# Altium PCB PCB4.PcbDoc
Units mm, origin at the board's own origin, x right, y up, seen from the top; angles counter-clockwise.
Board outline 56 x 20 mm, 2 copper layers (Top Layer, Bottom Layer); 31 components, 23 nets, 120 pads, 17 vias.
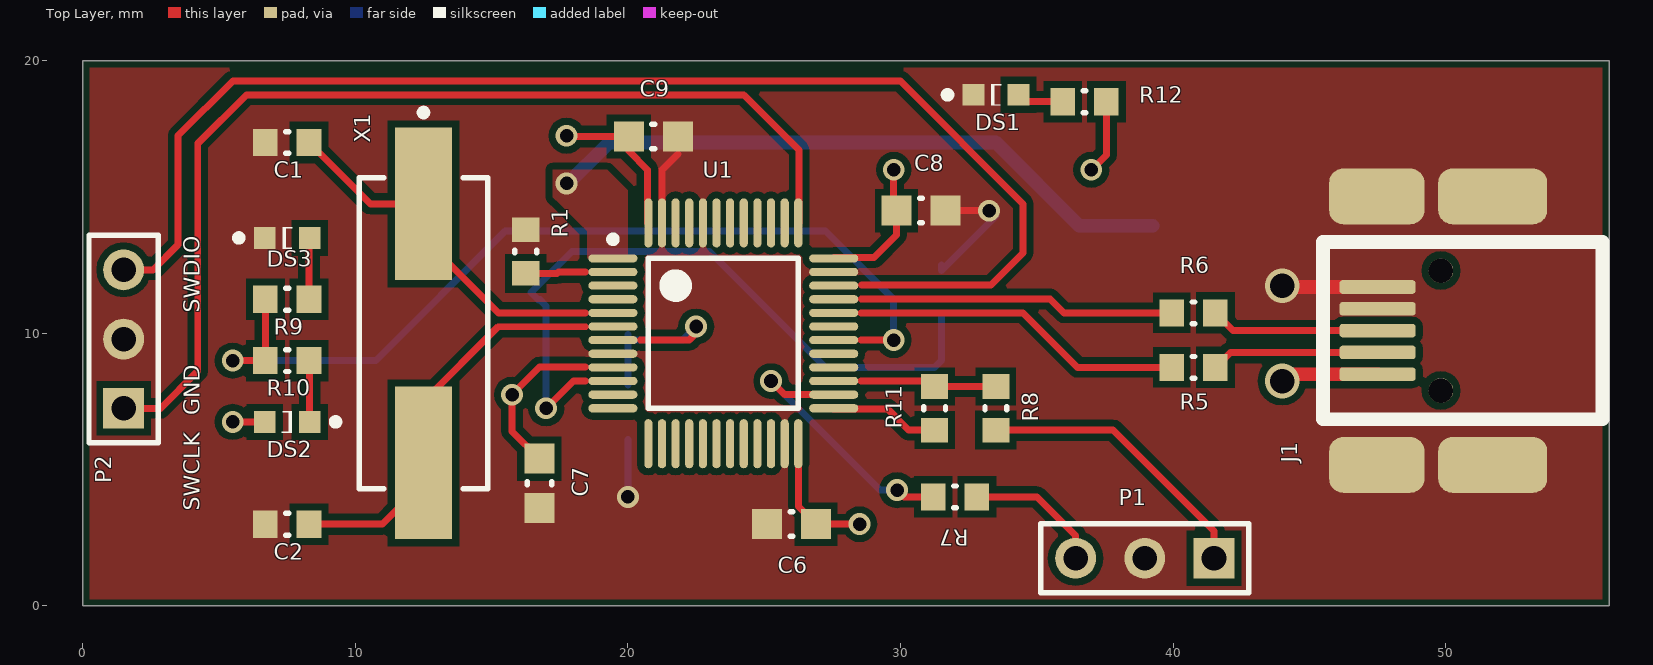
[diagram p0: Top Layer view]
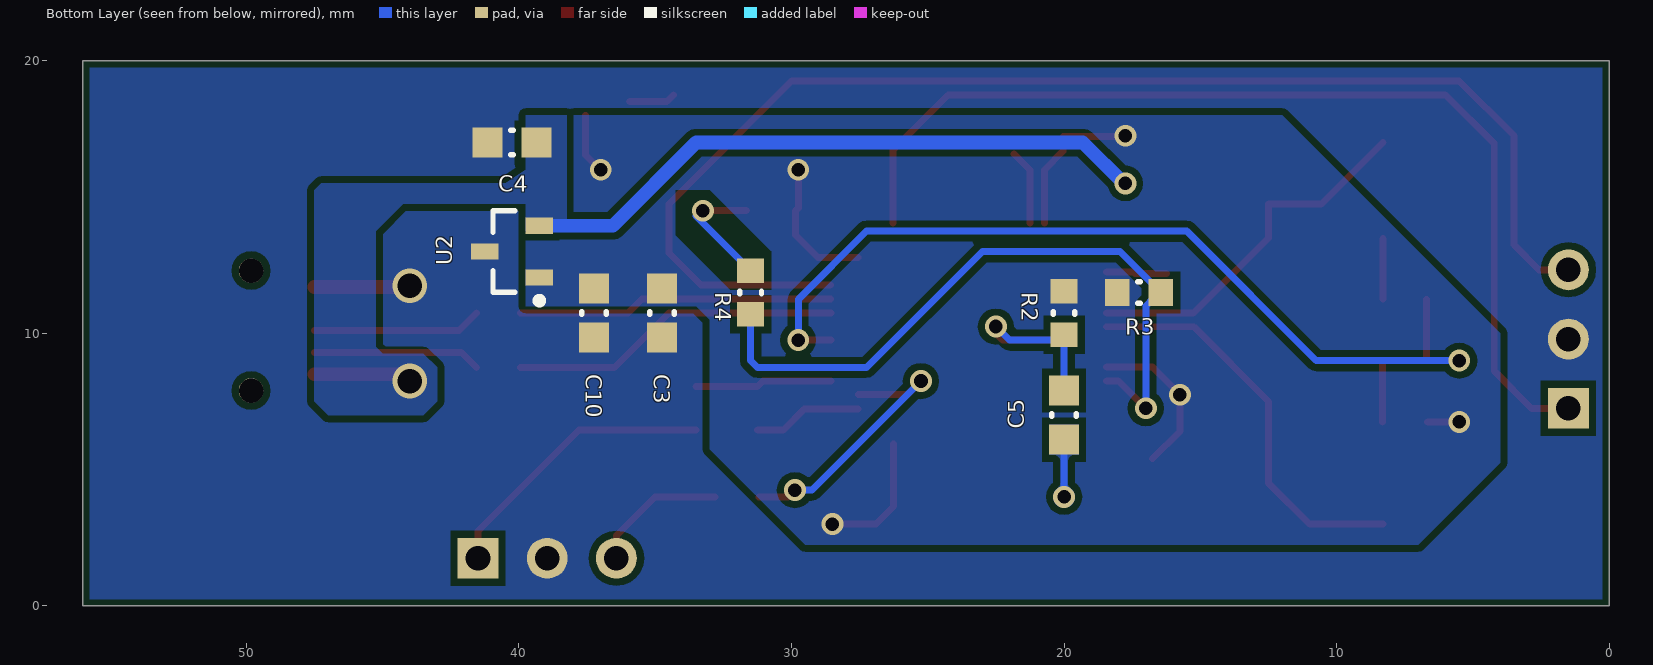
[diagram p1: Bottom Layer view, seen from below]

## Layer stack, top to bottom
Top Solder: solder mask 0.0102, Solder Resist, Dk 3.5
Top Layer: signal copper 0.0356
Dielectric 1: dielectric 0.32, FR-4, Dk 4.8
Bottom Layer: signal copper 0.0356
Bottom Solder: solder mask 0.0102, Solder Resist, Dk 3.5

## Board outline
0,0 56,0 56,20 0,20

## Design rules (kind name [scope] priority, off if disabled: settings)
Clearance [All] p1: gap=0.254
MinimumSolderMaskSliver [All] p1: minsoldermaskwidth=0.2
PlaneConnect [All] p1: planeconnectstyle=Direct reliefexpansion=0.508 reliefentries=4 reliefconductorwidth=0.254 reliefairgap=0.254
PolygonConnect [All] p1: connectstyle=Direct reliefconductorwidth=0.254 reliefentries=4 polygonreliefangle="90 Angle" airgapwidth=0.254
RoomDefinition Sheet2 [InComponentClass('Sheet2')] p1: confinementstyle=ConfineIn formatcopy=TRUE lockcomponents=FALSE outline -59.5,-60.6 -8.7,-60.6 -8.7,-35.2 -59.5,-35.2
RoutingVias [All] p1: holewidth=0.711 width=1 viastyle="Through Hole" minholewidth=0.5 minwidth=0.8 maxholewidth=0.9 maxwidth=1.27
SilkToSilkClearance [All] p1 off: silktosilkclearance=0.254
SilkToSolderMaskClearance [IsPad] p1 off: minsilkscreentomaskgap=0.254 clearancetoexposedcopper=TRUE
SolderMaskExpansion [All] p1: expansion=0.102
Width [All] p1: maxlimit=0.5 minlimit=0.254 preferedwidth=0.3
26 further rules are at their usual default settings.

## Components (designator, comment, footprint, x,y, rotation, side; value= is the part's Value field where it differs from the comment)
C1 "CAP 6.8uF 6.3V 0603(1608)" CAPC0603(1608)100_N 7.5,17 r0 top
C2 "CAP 6.8uF 6.3V 0603(1608)" CAPC0603(1608)100_N 7.5,3 r0 top
C3 "CAP 0.1uF 6.3V 0603(1608)" CAPC0603(1608)100_M 34.75,10.75 r90 bottom
C4 "CAP 0.1uF 6.3V 0603(1608)" CAPC0603(1608)100_M 40.25,17 r180 bottom
C5 "CAP 0.1uF 6.3V 0603(1608)" CAPC0603(1608)100_M 20,7 r270 bottom
C6 "CAP 0.1uF 6.3V 0603(1608)" CAPC0603(1608)100_M 26,3 r0 top
C7 "CAP 0.1uF 6.3V 0603(1608)" CAPC0603(1608)100_M 16.75,4.5 r270 top
C8 "CAP 0.1uF 6.3V 0603(1608)" CAPC0603(1608)100_M 30.75,14.5 r0 top
C9 "CAP 0.1uF 6.3V 0603(1608)" CAPC0603(1608)100_M 20.931,17.219 r0 top
C10 "CAP 0.1uF 6.3V 0603(1608)" CAPC0603(1608)100_M 37.25,10.75 r90 bottom
DS1 "APG1608SURKC/T" KING-LED0603-25-RED_V 33.5,18.75 r180 top
DS2 "APG1608SURKC/T" KING-LED0603-25-RED_V 7.5,6.75 r0 top
DS3 "APG1608SURKC/T" KING-LED0603-25-RED_V 7.5,13.5 r180 top
J1 "67503-1020" MOLX-67503-1020_V 47.5,8.5 r180 top
P1 "Header 3" HDR1X3 41.5,1.75 r180 top
P2 "Header 3" HDR1X3 1.5,7.25 r90 top
R1 "10k" RESC0603(1608)_N 16.25,13 r270 top
R2 "10k" RESC0603(1608)_N 20,10.75 r90 bottom
R3 "4.7k" RESC0603(1608)_N 17.25,11.5 r0 bottom
R4 "4.7k" RESC0603(1608)_N 31.5,11.5 r270 bottom
R5 "22" RESC0603(1608)_N 40.75,8.75 r180 top
R6 "22" RESC0603(1608)_N 40.75,10.75 r180 top
R7 "22" RESC0603(1608)_N 32,4 r180 top
R8 "22" RESC0603(1608)_N 33.5,7.25 r90 top
R9 "220" RESC0603(1608)_N 7.5,11.25 r180 top
R10 "220" RESC0603(1608)_N 7.5,9 r180 top
R11 "100" RESC0603(1608)_N 31.25,7.25 r270 top
R12 "1k" RESC0603(1608)_N 36.75,18.5 r180 top
U1 "STM32F102C8T6" STM-LQFP48_N 23.5,10 r0 top locked
U2 "LM3480IM3-3.3" MF03A_L 40.25,13 r0 bottom
X1 "8MHz" ABRA-ABLS2-2_V 12.5,10 r270 top

## Footprints (in the part's own frame and the unit in brackets; to place one, negate y for a bottom-side part, rotate by r counter-clockwise, add the part's x,y. Pads: shape width x height; smd on the part's side, far side on the other; paste and mask are expansions set on the pad)
ABRA-ABLS2-2_V [mm] "SMD, 2-Leads, Body 11.4x4.7mm, Height 3.3mm"
  rect 5.6x2.1 smd: 1(-4.75,0) 2(4.75,0)
  silkscreen extent -8.22,-2.35 5.7,2.35, body extent -5.7,-2.35 5.7,2.35, height 3.3
CAPC0603(1608)100_M [mm] "Chip Capacitor, Body 1.6x0.8mm, Height 1.0mm, IPC Low Density"
  rect 1.1x1.1 smd: 1(-0.9,0) 2(0.9,0)
  silkscreen extent -0.05,-0.45 0.05,0.45, body extent -0.87,-0.47 0.88,0.48, height 1
CAPC0603(1608)100_N [mm] "Chip Capacitor, Body 1.6x0.8mm, Height 1.0mm, IPC Medium Density"
  rect 0.9x1 smd: 1(-0.8,0) 2(0.8,0)
  silkscreen extent -0.05,-0.4 0.05,0.4, body extent -0.87,-0.48 0.88,0.47, height 1
HDR1X3 [mm] "Connector; Header; 3 Position"
  rect 1.5x1.5 hole 0.9: 1(0,0)
  round 1.5 hole 0.9: 2(2.54,0) 3(5.08,0)
  silkscreen extent -1.27,-1.27 6.35,1.27
KING-LED0603-25-RED_V [mm] "LED, SMT, Body 1.6x0.8mm, 0.28mm Thickness, Red"
  rect 0.8x0.8 smd paste+0: 1(-0.825,0) 2(0.825,0)
  silkscreen extent -0.2,-0.4 1.9,0.4, body extent -0.8,-0.4 0.8,0.4, height 0.28
MF03A_L [mm] "SOT23, 3-Leads, Body 2.9x1.3mm, Pitch 0.95mm, Lead Span 2.4mm, IPC High Density"
  rect 1x0.6 smd: 1(-1,0.95) 2(-1,-0.95) 3(1,0)
  silkscreen extent -1.12,-1.5 0.7,1.92, body extent -0.7,-1.52 0.7,1.52, height 1.12
MOLX-67503-1020_V [mm] "Mini USB Connector, SMT, Righer Angle"
  rrect50% 2.8x0.5 smd: 1(0,0) 2(0,-0.8) 3(0,-1.6) 4(0,-2.4) 5(0,-3.2)
  rrect50% 3.5x2.05 smd: 6(0.025,3.325) 8(0.025,-6.525)
  rrect50% 4x2.05 smd: 7(-4.225,3.325) 9(-4.225,-6.525)
  round 0.9 hole 0.9 unplated: X(-2.325,-3.8) Y(-2.325,0.6)
  silkscreen extent -8.25,-4.85 2,1.65, body extent -8.22,-6.56 0.78,3.34, height 3.95
RESC0603(1608)_N [mm] "Chip Resistor, Body 1.6x0.8mm, IPC Medium Density"
  rect 0.9x1 smd: 1(-0.8,0) 2(0.8,0)
  silkscreen extent -0.05,-0.4 0.05,0.4, body extent -0.85,-0.47 0.85,0.47, height 0.6
STM-LQFP48_N [mm] "QFP, 48-Leads, Body 7x7mm, Pitch 0.5mm, IPC Medium Density"
  oval 1.8x0.3 smd: 1(-4.05,2.75) 2(-4.05,2.25) 3(-4.05,1.75) 4(-4.05,1.25) 5(-4.05,0.75) 6(-4.05,0.25) 7(-4.05,-0.25) 8(-4.05,-0.75) 9(-4.05,-1.25) 10(-4.05,-1.75) 11(-4.05,-2.25) 12(-4.05,-2.75) 25(4.05,-2.75) 26(4.05,-2.25) 27(4.05,-1.75) 28(4.05,-1.25) 29(4.05,-0.75) 30(4.05,-0.25) 31(4.05,0.25) 32(4.05,0.75) 33(4.05,1.25) 34(4.05,1.75) 35(4.05,2.25) 36(4.05,2.75)
  oval 0.3x1.8 smd: 13(-2.75,-4.05) 14(-2.25,-4.05) 15(-1.75,-4.05) 16(-1.25,-4.05) 17(-0.75,-4.05) 18(-0.25,-4.05) 19(0.25,-4.05) 20(0.75,-4.05) 21(1.25,-4.05) 22(1.75,-4.05) 23(2.25,-4.05) 24(2.75,-4.05) 37(2.75,4.05) 38(2.25,4.05) 39(1.75,4.05) 40(1.25,4.05) 41(0.75,4.05) 42(0.25,4.05) 43(-0.25,4.05) 44(-0.75,4.05) 45(-1.25,4.05) 46(-1.75,4.05) 47(-2.25,4.05) 48(-2.75,4.05)
  silkscreen extent -4.17,-2.75 2.75,3.57, body extent -3.5,-3.5 3.5,3.5, height 1.6

## Part data
C1 C2: library part CMP-1035-02791-1, "CAP 6.8uF 6.3V ±20% 0603 (1608 Metric) Thickness 1mm SMD"
C3 C4 C5 C6 C7 C8 C9 C10: library part CMP-1035-01870-1, "CAP 0.1uF 6.3V ±20% 0603 (1608 Metric) Thickness 1mm SMD"
DS1 DS2 DS3: library part CMP-0404-00004-1, "Ultra Thin Hyper Red SMD Chip LED Lamp, 2 to 2.5 V, -40 to 85 degC, Body 1.6 x 0.8 mm, 0.28 mm Thickness, RoHS, Tape and Reel"
J1: library part CMP-0411-00002-1, "USB, MINI, SMD, RA KME04-USBMU03A01"
P1 P2: "Header, 3-Pin"
R1 R2 R3 R4 R5 R6 R7 R8 R9 R10 R11 R12: library part CMP-1012-00514-1, "10K 0.1W 1% 0603 (1608 Metric)  SMD"
U1: library part CMP-0237-00173-2, "ARM Cortex-M3 32-bit MCU, 64 KB Flash, 10 KB Internal RAM, 37 I/Os, 48-pin LQFP, -40 to 85 degC, Tray"
U2: library part CMP-0062-02201-2, "100 mA, Quasi Low-Dropout Linear Voltage Regulator, 3-pin SOT-23"
X1: library part CMP-0277-00002-1, "Low Profile Surface Mount Microprocessor Crystal, 4.096 MHz +/-30 ppm, 180 Ohm, -40 to 85 degC, 2-Pin 11.4 x 4.7 x 3.3 mm SMD, RoHS, Tape and Reel"

## Via types
v1: diameter 0.8, hole 0.5, Top Layer to Bottom Layer, 15 vias
v2: diameter 1.27, hole 0.9, Top Layer to Bottom Layer, 2 vias

## Nets (pads, with @x,y where several pads share a name; then routed paths per layer and width w, separated by ;. In a path a pad name is that pad's centre, name@x,y a point inside that pad or via, vN(x,y) a via of type N, cw(c..) or ccw(c..) an arc to the next point about the centre after c; other vN are vias at no path point)
3V3: C3.2 C6.2 C7.1 C8.1 C9.1 C10.2 DS2.1 R2.2 R3.2 R12.1 U1.9 U1.24 U1.36 U1.48 U2.1 | length 24.9
  Top Layer w0.254: v1(5.5,6.75) DS2.1 ; C7.1 15.75,6.4 v1(15.75,7.75) 16.758,8.758 18.441,8.758 ; v1(17.75,17.25) 17.781,17.219 C9.1 20.031,16.688 20.719,16 U1.48@20.719,14.05 ; U1.24 26.25,3.65 C6.2 v1(28.5,3) ; U1.36@27.55,12.781 29.031,12.781 29.85,13.6 C8.1 29.75,14.6 v1(29.75,16) ; v1(37,16) 37.55,16.55 37.55,18
5V: C4.2 J1.1 U1.1 U2.2 | length 27.1
  Top Layer w0.5: v2(44,8.25) 44.25,8.5 J1.1
  Bottom Layer w0.254: v1@17.75,15.438 v1(17.75,15.5)
  Bottom Layer w0.5: v1@17.75,15.438 19.312,17 33.5,17 36.55,13.95 U2.2
GND: C1.1 C2.1 C3.1 C4.1 C5.2 C6.1 C7.2 C8.2 C9.2 C10.1 DS1.2 DS3.2 J1.4 J1.5 J1.6 J1.7 J1.8 J1.9 P1.2 P2.2 R1.1 R4.1 U1.8 U1.23 U1.35 U1.44 U1.47 U2.3 | length 13.9
  Top Layer w0.254: U1.47 21.25,16 21.831,16.581 ; C8.2 33.5,14.5 v1(33.25,14.5)
  Top Layer w0.5: v2(44,11.75) 44.05,11.7 J1.5
  Bottom Layer w0.254: v1(20,4) C5.2 ; R4.1@31.5,12.5 R4.1 33.5,14.3 33.3,14.5 v1(33.25,14.5)
NetC1_2: C1.2 U1.5 X1.1 | length 13.5
  Top Layer w0.254: C1.2 10.55,14.75 X1.1 12.5,13.5 15.25,10.75 18.449,10.75
NetC2_2: C2.2 U1.6 X1.2 | length 14.9
  Top Layer w0.254: C2.2 11,3 12.5,4.5 X1.2 12.5,7.5 15.242,10.242 18.441,10.242
NetC5_1: C5.1 R2.1 U1.7 | length 6.8
  Top Layer w0.254: 20.451,9.75 22.25,9.75 22.5,10 v1(22.5,10.25)
  Bottom Layer w0.254: C5.1@20,8.1 R2.1 ; R2.1@20.2,9.75 22,9.75 v1(22.5,10.25)
NetDS1_1: DS1.1 R12.2 | length 1.7
  Top Layer w0.254: DS1.1 34.575,18.5 R12.2
NetDS2_2: DS2.2 R10.1 | length 2.2
  Top Layer w0.254: DS2.2 R10.1@8.325,8.975
NetDS3_1: DS3.1 R9.1 | length 2.2
  Top Layer w0.254: R9.1 DS3.1@8.3,13.475
NetJ1_2: J1.2 R5.1 | length 6.2
  Top Layer w0.254: R5.1 42.1,9.3 J1.2
NetJ1_3: J1.3 R6.1 | length 6.2
  Top Layer w0.254: R6.1 42.2,10.1 J1.3
NetP1_1: P1.1 R8.1 | length 10.5
  Top Layer w0.254: R8.1 37.8,6.45 41.5,2.75 P1.1
NetP1_3: P1.3 R7.1 | length 5
  Top Layer w0.254: R7.1 35,4 36.42,2.58 P1.3
NetP2_1: P2.1 U1.37 | length 37.9
  Top Layer w0.254: P2.1 2.85,7.25 4.219,8.619 4.219,16.969 6,18.75 24.25,18.75 26.281,16.719 U1.37@26.281,14.05
NetP2_3: P2.3 U1.34 | length 48.3
  Top Layer w0.254: P2.3 2.58,12.33 3.5,13.25 3.5,17.25 5.508,19.258 29.992,19.258 34.5,14.75 34.5,12.951 33.315,11.766 28.567,11.766
NetR1_2: R1.2 U1.2 | length 2.2
  Top Layer w0.254: R1.2 17.4,12.2 17.45,12.25 18.449,12.25
NetR3_1: R3.1 R4.2 U1.10 | length 25.6
  Top Layer w0.254: v1(17,7.25) 18,8.25 18.449,8.25
  Bottom Layer w0.254: v1(17,7.25) 17,11 16.75,11.25 16.725,11.225 R3.1 17.95,13 23,13 27.25,8.75 31.25,8.75 31.5,9 R4.2
NetR5_2: R5.2 U1.32 | length 12.2
  Top Layer w0.254: 28.551,10.75 34.5,10.75 36.5,8.75 R5.2
NetR6_2: R6.2 U1.33 | length 11.6
  Top Layer w0.254: 28.559,11.258 35.492,11.258 36,10.75 R6.2
NetR7_2: R7.2 U1.26 | length 10.2
  Top Layer w0.254: v1(25.25,8.25) 25.75,7.75 U1.26 ; v1(29.875,4.25) 30.125,4 30.75,4 R7.2
  Bottom Layer w0.254: v1(25.25,8.25) 29.25,4.25 v1(29.875,4.25)
NetR8_2: R8.2 R11.1 U1.27 | length 5
  Top Layer w0.254: 28.551,8.25 31.05,8.25 R11.1 R8.2
NetR9_2: R9.2 R10.2 U1.30 | length 33.4
  Top Layer w0.254: v1(5.5,9) R10.2 R9.2 ; 28.551,9.75 v1(29.75,9.75)
  Bottom Layer w0.254: v1(5.5,9) 10.75,9 15.5,13.75 27.25,13.75 29.75,11.25 v1(29.75,9.75)
NetR11_2: R11.2 U1.25 | length 4
  Top Layer w0.254: U1.25@27.55,7.219 29.531,7.219 30.3,6.45 R11.2
pads on no net: J1.X J1.Y U1.3 U1.4 U1.11 U1.12 U1.13 U1.14 U1.15 U1.16 U1.17 U1.18 U1.19 U1.20 U1.21 U1.22 U1.28 U1.29 U1.31 U1.38 U1.39 U1.40 U1.41 U1.42 U1.43 U1.45 U1.46

## Polygon pours and split planes (outlines as drawn)
5V on Bottom Layer "5V_L02_P004" (solid, pour order 4): 39.75,18 38.25,18 38.25,13.75 39.75,13.75 39.75,13.5 39.75,14.75 44.25,14.75 45.25,13.75 45.25,9.5 45,9.25 44,9.25 43.5,9.25 43,8.75 43,7.5 43.5,7 46.25,7 47,7 47.5,7.5 47.5,11.75 47.5,15.25 47.25,15.5 40.5,15.5 39.75,16
GND on Bottom Layer "GND_L02_P006" (solid, pour order 6): 44.75,11.25 44.75,12.75 43.75,13.75 43.5,14 40.75,14 40.75,10.75 40.5,10.5 34,10.5 34,6.25 42,6.25 42,10.25 42.25,10.5 43.5,10.5 44,10.5
3V3 on Bottom Layer "3V3_L02_P036" (solid, pour order 36): 18,18 12,18 4,10 4,6 4,5.25 7,2.25 29.25,2.25 29.5,2.25 33,5.75 33,10.5 33.5,11 39.75,11 39.75,18 17.75,18
GND on Bottom Layer "GND_L02_P040" (solid, pour order 40): 0.25,0.25 0.25,19.75 55.75,19.75 55.75,0.25
5V on Top Layer "5V_L01_P038" (solid, pour order 38): 17.25,16 17.25,15 17.5,14.75 18.5,13.75 18.5,12.75 20,12.75 20,15.25 19.25,16 17.25,16
GND on Top Layer "GND_L01_P042" (solid, pour order 42): 0.25,0.25 0.25,19.75 55.75,19.75 55.75,0.25

## Other copper
Bottom Layer:
  pour cut-out: 30.746,13.004 30.754,13.004 33,15.25 34.25,15.25 34.25,13.592 32.254,11.596

## Silkscreen, mask and mechanical layers (free items; w line width, h text height)
Top Overlay:
  text "SWDIO" at 4.5,10.75 h1 r90
  text "GND" at 4.5,7 h1 r90
  text "SWCLK" at 4.5,3.5 h1 r90
Mechanical 1:
  the board outline again, w0.254
Mechanical 13:
  text "STLINK TOOL   ----    John Paul" at 3.5,-4.25 h1.52